# EAGLE board Shiny Kasi (EAGLE 9.7.0)

Size 406.3 x 126.03 mm. Coordinates in mm from the lower left corner, seen from the top.
Outline: 0,0 406.3,0 406.3,126.03 0,126.03 0,0
Copper layers (1*16): Top 0.035mm / dielectric 1.5mm / Bottom 0.035mm
Design rules "default": minimum track width 6mil, minimum drill 0.35mm, track to track 6mil, track to pad 6mil, pad to pad 6mil, via to via 6mil, smd to smd 6mil, copper to edge 40mil, drill to drill 6mil, minimum pad ring 10mil, minimum via ring 8mil, stop-mask expansion 4mil, vias tented up to drill 0mil, thermal gap 10mil

## Footprints (pad centres in the part's own frame; a part is rotated, then mirrored left to right if it is on the bottom)
BATTERY-GENERIC = drill 1.118 pad 3.15 octagon: + 2.54,0; - -2.54,0
HC-SR04 = drill 1.016 long: 1 -3.81,0; 2 -1.27,0; 3 1.27,0; 4 3.81,0
1X08 = drill 1.016 long: 1 -8.89,0; 2 -6.35,0; 3 -3.81,0; 4 -1.27,0; 5 1.27,0; 6 3.81,0; 7 6.35,0; 8 8.89,0
MOTOR = drill 1.118 pad 3.15 octagon: + 2.54,0; - -2.54,0
SWITCH-SPDT-PTH-8.5X3.7MM = drill 1.016 pad 1.88: 1 -2.54,0; 2 0,0; 3 2.54,0
SG90 = drill 1.016 long: 1 -2.54,0; 2 0,0; 3 2.54,0
ARDUINO-UNO-R3-SHIELD = drill 1.016 pad 1.88: 3.3V 24.13,-2.54; 5V 24.13,0; A0 24.13,12.7; A1 24.13,15.24; A2 24.13,17.78; A3 24.13,20.32; A4 24.13,22.86; A5 24.13,25.4; AREF -24.13,-13.97; D2 -24.13,20.32; D3 -24.13,17.78; D4 -24.13,15.24; D5 -24.13,12.7; D6 -24.13,10.16; D7 -24.13,7.62; D8 -24.13,3.81; D9 -24.13,1.27; D10 -24.13,-1.27; D11 -24.13,-3.81; D12 -24.13,-6.35; D13 -24.13,-8.89; GND@0 24.13,2.54; GND@1 24.13,5.08; GND@2 -24.13,-11.43; IOREF 24.13,-7.62; NC 24.13,-10.16; RES 24.13,-5.08; RX -24.13,25.4; SCL -24.13,-19.05; SDA -24.13,-16.51; TX -24.13,22.86; VIN 24.13,7.62
DIP762W53P254L1969H508Q16B = drill 0.743 pad 1.343: 1 -3.81,8.89; 2 -3.81,6.35; 3 -3.81,3.81; 4 -3.81,1.27; 5 -3.81,-1.27; 6 -3.81,-3.81; 7 -3.81,-6.35; 8 -3.81,-8.89; 9 3.81,-8.89; 10 3.81,-6.35; 11 3.81,-3.81; 12 3.81,-1.27; 13 3.81,1.27; 14 3.81,3.81; 15 3.81,6.35; 16 3.81,8.89
LCD-I2C = drill 1.016 long: 1 -19.05,-5.08; 2 -19.05,-7.62; 3 -19.05,-10.16; 4 -19.05,-12.7

## Placement (x,y rotation side)
BAT1  9V  [BATTERY-GENERIC]  181.65,42.48 180 top
DIST1  DISTANCE-SENSOR-4PINHC-SR04  [HC-SR04]  124.38,87.25 0 top
KEYPAD1  KEYPAD-4X4  [1X08]  251.76,36.98 0 top
M1  MOTOR_HDR  [MOTOR]  201.86,67.8 0 top
S1  TOGGLE  [SWITCH-SPDT-PTH-8.5X3.7MM]  57.21,116.09 0 top
SERVO1  SERVOSG90  [SG90]  112.48,42.14 0 top
U1  ARDUINO-UNO-R3-SHIELD  [ARDUINO-UNO-R3-SHIELD]  47.88,29.84 270 top
U2  L293E  [DIP762W53P254L1969H508Q16B]  156.35,56.4 90 top
U3  LCD-16X2-I2CSUNFOUNDER-IIC  [LCD-I2C]  350.68,118.48 0 top

## Library data of the parts
BAT1 DIST1 KEYPAD1 M1 S1 SERVO1 U1-U3 = Tinkercad

## Nets
BAT1+: BAT1.+ U2.8
BAT1-: BAT1.- DIST1.4 S1.1 SERVO1.1 U1.GND@0 U1.GND@1 U1.GND@2 U2.13 U2.16 U3.1
M1_+: M1.+ U2.6
M1_-: M1.- U2.3
U1_5V: DIST1.1 S1.3 SERVO1.2 U1.5V U3.2
U1_A0: U1.A0 U2.1
U1_A1: U1.A1 U2.2
U1_A2: U1.A2 U2.7
U1_A3: S1.2 U1.A3
U1_A4: U1.A4 U3.3
U1_A5: U1.A5 U3.4
U1_D2: DIST1.2 U1.D2
U1_D3: DIST1.3 U1.D3
U1_D4: SERVO1.3 U1.D4
U1_D5: KEYPAD1.1 U1.D5
U1_D6: KEYPAD1.2 U1.D6
U1_D7: KEYPAD1.3 U1.D7
U1_D8: KEYPAD1.4 U1.D8
U1_D9: KEYPAD1.5 U1.D9
U1_D10: KEYPAD1.6 U1.D10
U1_D11: KEYPAD1.7 U1.D11
U1_D12: KEYPAD1.8 U1.D12

## Tracks (layer width: path | path; a pad name or v marks a point on that pad's centre or on a via)
BAT1+  (1 unrouted)
BAT1-  (9 unrouted)
M1_+  (1 unrouted)
M1_-  (1 unrouted)
U1_5V  (4 unrouted)
U1_A0  (1 unrouted)
U1_A1  (1 unrouted)
U1_A2  (1 unrouted)
U1_A3  (1 unrouted)
U1_A4  (1 unrouted)
U1_A5  (1 unrouted)
U1_D2  (1 unrouted)
U1_D3  (1 unrouted)
U1_D4  (1 unrouted)
U1_D5  (1 unrouted)
U1_D6  (1 unrouted)
U1_D7  (1 unrouted)
U1_D8  (1 unrouted)
U1_D9  (1 unrouted)
U1_D10  (1 unrouted)
U1_D11  (1 unrouted)
U1_D12  (1 unrouted)